# EAGLE board Distributer (EAGLE 7.6.0)
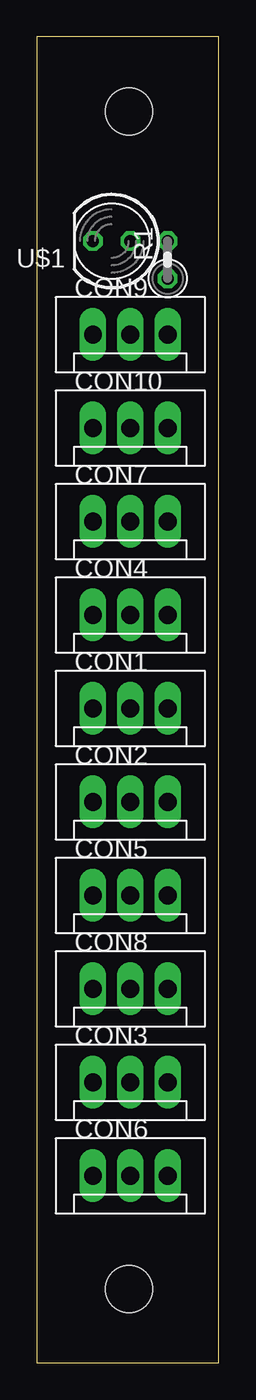
[diagram p0: board, top side]
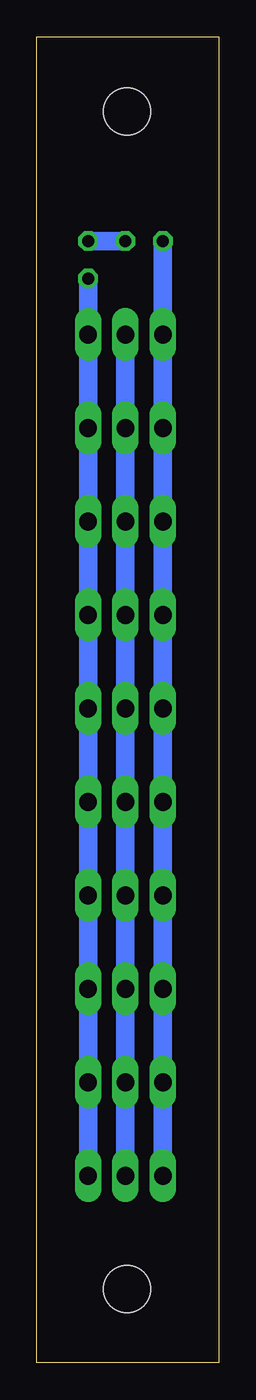
[diagram p1: board, bottom side, seen from below]

Size 12.37 x 90.08 mm. Coordinates in mm from the lower left corner, seen from the top.
Outline: 0,0 12.37,0 12.37,90.08 0,90.08 0,0
Copper layers (1*16): Top 0.035mm / dielectric 1.5mm / Bottom 0.035mm
Design rules "default": minimum track width 10mil, minimum drill 24mil, track to track 8mil, track to pad 8mil, pad to pad 8mil, via to via 8mil, smd to smd 8mil, copper to edge 40mil, drill to drill 8mil, minimum pad ring 10mil, minimum via ring 8mil, stop-mask expansion 4mil, vias tented up to drill 0mil, thermal gap 10mil
Holes 3.2 mm at 6.25,5 6.25,85

## Footprints (pad centres in the part's own frame; a part is rotated, then mirrored left to right if it is on the bottom)
CON3 = drill 1.2 long: P$1 2.54,0; P$2 0,0; P$3 -2.54,0
1/4W-V1_(0207/2V) = drill 0.813 octagon: 1 -1.27,0; 2 1.27,0
LED5MM = drill 0.813 octagon: A -1.27,0; K 1.27,0

## Placement (x,y rotation side)
CON1  CON3  [CON3]  6.35,44.45 0 top
CON2  CON3  [CON3]  6.35,38.1 0 top
CON3  CON3  [CON3]  6.35,19.05 0 top
CON4  CON3  [CON3]  6.35,50.8 0 top
CON5  CON3  [CON3]  6.35,31.75 0 top
CON6  CON3  [CON3]  6.35,12.7 0 top
CON7  CON3  [CON3]  6.35,57.15 0 top
CON8  CON3  [CON3]  6.35,25.4 0 top
CON9  CON3  [CON3]  6.35,69.85 0 top
CON10  CON3  [CON3]  6.35,63.5 0 top
R1  2k  [1/4W-V1_(0207/2V)]  8.89,74.93 90 top
U$1  LED(砲弾型)5  [LED5MM]  5.08,76.2 180 top

## Library data of the parts
CON1-CON10 = (コネクタ)XH
R1 = (Foundation)抵抗
U$1 = (半導体)LED

## Nets
GND: CON1.P$3 CON2.P$3 CON3.P$3 CON4.P$3 CON5.P$3 CON6.P$3 CON7.P$3 CON8.P$3 CON9.P$3 CON10.P$3 U$1.K
N$1: CON1.P$1 CON2.P$1 CON3.P$1 CON4.P$1 CON5.P$1 CON6.P$1 CON7.P$1 CON8.P$1 CON9.P$1 CON10.P$1 R1.1
N$2: CON1.P$2 CON2.P$2 CON3.P$2 CON4.P$2 CON5.P$2 CON6.P$2 CON7.P$2 CON8.P$2 CON9.P$2 CON10.P$2
N$7: R1.2 U$1.A

## Tracks (layer width: path | path; a pad name or v marks a point on that pad's centre or on a via)
GND
  Bottom 1.27: CON6.P$3 CON3.P$3 CON8.P$3 CON5.P$3 CON2.P$3 CON1.P$3 CON4.P$3 CON7.P$3 CON10.P$3 CON9.P$3 U$1.K
N$1
  Bottom 1.27: R1.1 CON9.P$1 CON10.P$1 CON7.P$1 CON4.P$1 CON1.P$1 CON2.P$1 CON5.P$1 CON8.P$1 CON3.P$1 CON6.P$1
N$2
  Bottom 1.27: CON6.P$2 CON3.P$2 CON8.P$2 CON5.P$2 CON2.P$2 CON1.P$2 CON4.P$2 CON7.P$2 CON10.P$2 CON9.P$2
N$7
  Bottom 1.27: U$1.A R1.2